# Altium PCB PCB_AIO.PcbDoc (part 2 of 2)
Units mm, origin at the board's own origin, x right, y up, seen from the top; angles counter-clockwise.
Board outline 99.69 x 91.46 mm, 2 copper layers (Top Layer, Bottom Layer), stack 0.325 mm thick; 117 components, 99 nets, 490 pads, 154 vias.
Unrouted connection lines stored in the file: 95.
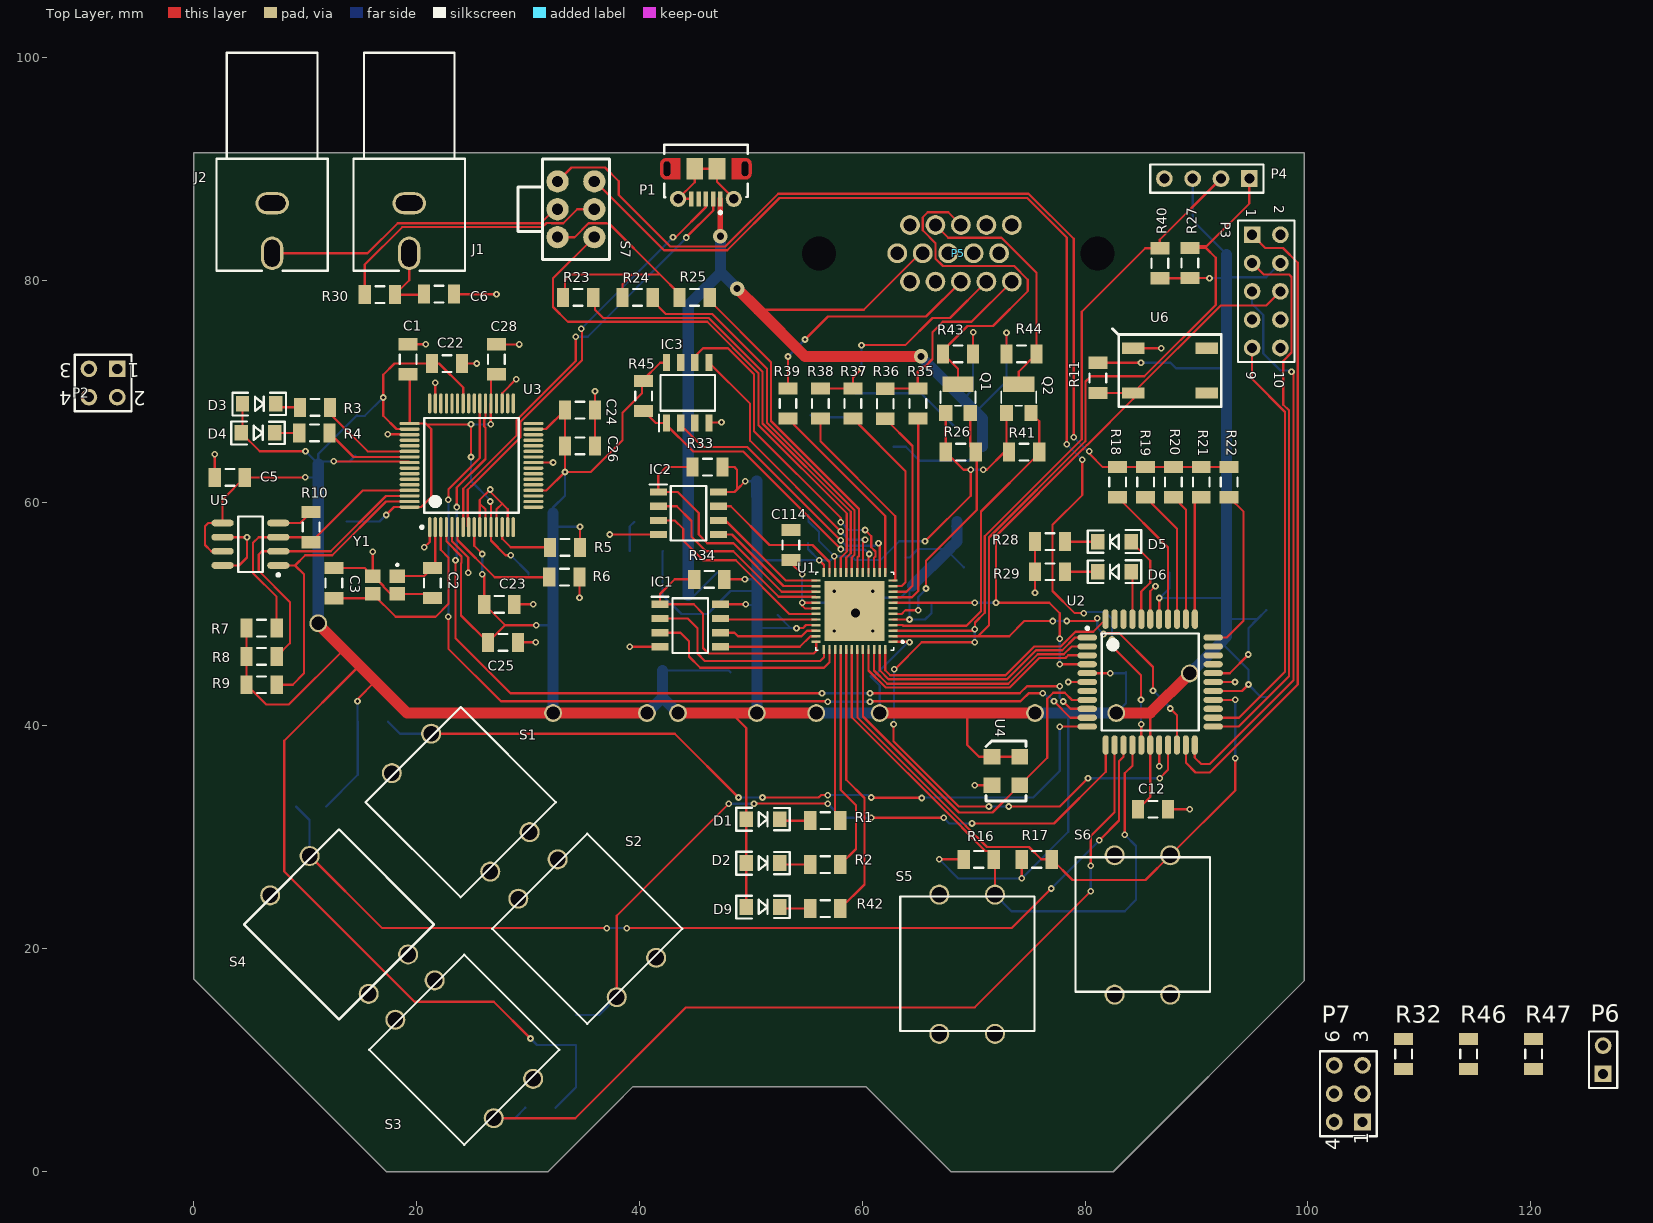
[diagram p0: Top Layer view]

## Via types
v1: diameter 0.6, hole 0.3, Top Layer to Bottom Layer, 151 vias
v2: diameter 1.3, hole 0.65, Top Layer to Bottom Layer, 3 vias

## Nets (pads, with @x,y where several pads share a name; then routed paths per layer and width w, separated by ;. In a path a pad name is that pad's centre, name@x,y a point inside that pad or via, vN(x,y) a via of type N, cw(c..) or ccw(c..) an arc to the next point about the centre after c; other vN are vias at no path point) (continued)
VDD_3.3V: (continued)
  Bottom Layer w0.2: v1(10.025,62.3) 11.106,62.3 11.176,62.23 ; v1(10.033,64.643) 11.176,63.5 ; 11.176,63.491 11.176,63.5 ; 11.418,63.733 v1(12.581,63.733) 13.996,63.733 C21.2 ; R15.1 14.731,35.606 R12.1 14.7,40.417 v1(14.7,42.198) ; C20.2@14.668,67.881 11.176,64.389 11.176,63.5 ; C20.2 15.367,67.818 v1(17.018,69.469) ; v1(25.908,53.594) v1(25.908,55.422) ; v1(30.226,11.938) 30.814,11.35 R13.1 34.309,7.559 R14.1 ; v1(30.734,49.022) 32.258,49.022 ; 32.258,57.912 32.305,57.865 v1(34.671,57.865) ; 32.258,59.09 32.258,59.596 33.321,60.659 v1(33.321,62.785) ; U7.4 48.013,44.976 C8.1 ; D7.1 42.088,55.655 U7.2 43.776,50.038 46.125,50.038 C9.2 50.515,52.101 50.546,52.07 ; v1(49.474,53.149) 50.546,53.149 ; v1(49.515,61.961) 50.531,61.961 50.703,62.133 ; v1(49.538,50.903) 49.599,50.842 50.546,50.838 ; 50.389,44.801 50.546,44.958 ; 50.546,48.764 v1(54.102,48.77) 53.597,48.77 C116.2 ; 50.546,54.864 v1(56.134,54.864) ; C115.2 55.134,55.864 v1(56.134,54.864) ; C117.2 55.19,58.348 56.134,57.404 56.134,56.579 v1(57.5,55.214) ; pad.2@61.568,41.148 61.568,43.627 C4.2 61.055,44.45 64.103,47.498 v1(64.25,47.498) ; v1(65.639,56.562) 63.314,56.562 61.624,54.872 59.407,54.872 59.065,55.214 v1(57.5,55.214) ; v1(66.92,28.02) 68.633,26.308 v1(74.314,26.308) 78.489,30.483 78.489,41.148 ; v1(69.737,62.992) v1(70.866,62.992) ; pad.2@76.2,41.402 76.454,41.148 ; v1(82.271,44.729) 83.606,44.729 C11.2 83.678,42.022 pad.2@82.804,41.148 ; v1(85.028,72.582) 87.676,72.582 88.164,72.094 92.16,72.094 92.71,72.644 ; v1(86.652,51.469) v1@86.695,51.469 ; C10.2 87.55,52.324 v1@86.695,51.469 ; pad.2@89.408,44.704 pad.2@89.916,45.212 ; P4.3 89.662,85.344 92.71,82.296 ; v1(91.172,80.184) 92.63,80.184 92.71,80.264 96.266,80.264 P3.4 ; 92.202,47.498 94.667,45.033 v1(94.667,43.706) 95.781,42.592 C13.2 ; 92.71,49.53 92.759,49.579 95.473,49.579 ; 92.71,51.562 92.617,51.469 v1@86.695,51.469 ; v1(94.662,46.402) 94.662,48.768 95.473,49.579 ; C14.2 95.473,49.579 ; v1(56.134,54.864) 57.15,54.864 v1(57.5,55.214)
  Bottom Layer w1: pad.2@11.176,49.201 11.176,62.23 11.176,63.491 ; pad.2@32.258,41.148 32.258,49.022 32.258,57.912 32.258,59.09 ; pad.2@40.686,41.148 42.088,42.55 ; U7.4 42.088,42.55 ; pad.2@43.49,41.148 42.088,42.55 ; 50.531,61.961 50.531,60.633 50.546,60.618 50.546,54.864 50.546,53.149 50.546,52.07 50.546,50.838 50.546,44.958 pad.2@50.546,41.148 ; pad.2@55.88,41.148 pad.2@61.568,41.148 ; pad.2@75.512,41.148 76.454,41.148 pad.2@82.804,41.148 ; pad.2@89.916,45.212 92.202,47.498 92.71,48.006 92.71,49.53 92.71,51.562 92.71,57.404 92.71,72.644 92.71,80.264 92.71,82.296
VGA_B: P5.3 R39.1 | length 21.2
  Top Layer w0.2: R39.1 v1(53.341,73.152) ; v1(54.864,74.676) 56.928,76.74 65.729,76.74 P5.3
  Bottom Layer w0.2: v1(53.341,73.152) v1(54.864,74.676)
VGA_B0: R39.2 U1.13 | length 17.5
  Top Layer w0.2: R39.2 53.341,67.563 62.068,58.836 U1.13
VGA_G: P5.2 R37.1 R38.1 | length 20.7
  Top Layer w0.2: R38.1 R37.1 59.166,71.262 v1(59.944,72.04) ; v1(59.944,74.168) 63.877,74.168 66.315,76.607 67.882,76.607 P5.2
  Bottom Layer w0.2: v1(59.944,72.04) v1(59.944,74.168)
VGA_G0: R37.2 U1.11 | length 17.9
  Top Layer w0.2: R37.2 63.877,62.872 63.877,52.868 63.551,52.542 U1.11
VGA_G1: R38.2 U1.12 | length 17.8
  Top Layer w0.2: R38.2 56.254,65.532 62.968,58.818 62.968,53.052 62.958,53.042 U1.12 ; R38.2@56.378,67.447 R38.2@56.59,67.235
VGA_HSYNC: P5.13 Q1.3 R43.2 | length 31.7
  Top Layer w0.2: Q1.3 68.604,72.04 R43.2 67.254,73.69 69.448,75.883 71.731,75.883 74.863,79.016 74.863,80.047 73.64,81.27 67.244,81.27 66.568,81.945 66.568,83.342 65.433,84.477 65.433,85.635 65.887,86.088 67.719,86.088 P5.13
VGA_R: P5.1 R35.1 R36.1 | length 17.6
  Top Layer w0.2: R36.1 62.089,70.283 R35.1 64.991,71.792 65.451,72.252 65.651,72.252 66.315,72.917 66.315,75.333 67.238,76.257 69.818,76.257 P5.1
VGA_R0: R35.2 U1.9 | length 18
  Top Layer w0.2: U1.9 64.466,51.542 65.024,52.1 65.024,67.55 R35.2
VGA_R1: R36.2 U1.10 | length 18
  Top Layer w0.2: R36.2 64.516,65.114 64.516,52.578 63.98,52.042 U1.10
VGA_VSYNC: P5.14 Q2.3 R44.2 | length 21.5
  Top Layer w0.2: P5.14 67.711,83.81 72.497,83.81 75.649,80.658 R44.2 74.051,71.792 Q2.3
VIDEO: J2.2B S7.2 | length 27.3
  Top Layer w0.2: J2.2B 15.607,82.409 18.308,85.11 31.151,85.11 32.401,86.36 S7.2
VIDEO_FPGA: R23.2 R24.2 R25.2 S7.1 | length 27.2
  Top Layer w0.2: S7.1 34.191,83.86 35.441,85.11 37.064,85.11 37.084,85.09 37.267,85.09 41.839,80.518 ; R23.2 33.321,78.617 33.321,79.984 33.855,80.518 39.37,80.518 ; R24.2 38.493,79.641 39.37,80.518 ; R25.2 43.608,78.749 41.839,80.518 ; 39.37,80.518 41.839,80.518
VIDEO_FPGA_1: R23.1 U1.20 | length 40
  Top Layer w0.2: R23.1 36.021,78.281 36.021,77.343 36.752,76.612 46.234,76.612 51.054,71.792 51.054,67.127 58.968,59.213 58.968,55.491 58.568,55.091 U1.20
VIDEO_FPGA_2: R24.1 U1.19 | length 34.8
  Top Layer w0.2: R24.1 41.193,78.149 42.38,76.962 46.544,76.962 51.466,72.04 51.466,67.21 59.318,59.358 59.318,55.346 59.068,55.096 U1.19
VIDEO_FPGA_3: R25.1 U1.18 | length 30.3
  Top Layer w0.2: R25.1 46.308,78.149 51.816,72.641 51.816,67.355 59.71,59.461 59.71,55.243 59.568,55.101 U1.18
VIDEO_UC: R18.2 R19.2 R20.2 R21.2 R22.2 S7.3 | length 87.3
  Top Layer w0.2: S7.3 33.909,90.11 36.908,90.11 38.145,88.873 38.145,87.641 42.755,83.031 47.738,83.031 52.464,87.757 74.93,87.757 78.981,83.706 78.981,66.018 78.876,65.913 v1(78.994,65.913) ; v1(80.391,64.643) 80.391,64.417 81.588,63.22 R18.2 R19.2 R20.2 R21.2 R22.2
  Bottom Layer w0.2: v1(78.994,65.913) 80.264,64.643 v1(80.391,64.643)
VIDEO_UC_1: R18.1 U2.37 | length 12.8
  Top Layer w0.2: R18.1 87.452,55.998 U2.37
VIDEO_UC_2: R19.1 U2.36 | length 12.1
  Top Layer w0.2: R19.1 88.252,57.698 U2.36
VIDEO_UC_3: R20.1 U2.35 | length 11.4
  Top Layer w0.2: R20.1 89.052,59.398 U2.35
VIDEO_UC_4: R21.1 U2.34 | length 11.2
  Top Layer w0.2: U2.34 89.852,59.942 R21.1
VIDEO_UC_5: R22.1 U2.33 | length 15
  Top Layer w0.2: U2.33 92.71,47.929 94.234,49.453 94.234,59.216 R22.1
pads on no net: P1.4 P3.7 P3.8 P5. P5.4 P5.11 P5.12 P5.15 S1.0 S1.3 S2.0 S2.3 S3.0 S3.3 S4.0 S4.3 S5.0 S5.3 S6.0 S6.3 U2.7 U2.25 U2.30 U2.31 U2.32 U2.42 U2.43 U3.19 U3.22 U3.26 U3.27 U3.28 U3.29 U3.30 U3.32 U3.33 U3.34 U3.36 U3.40 U3.41 U3.43 U3.44 U3.45 U3.46 U3.48 U3.52 U3.53 U3.57 U3.58 U3.59 U3.60 U6.2 U6.4
copper on no net: | length 81.4
  Top Layer w0.2: 40.386,68.246 41.462,67.17 42.442,67.17 42.442,66.999 44.809,64.633 49.299,64.633 v1(58.068,55.864) ; 43.712,67.17 43.712,66.999 45.687,65.024 49.686,65.024 v1(58.068,56.642) ; 46.252,72.594 49.942,68.905 49.942,65.575 v1(58.068,57.449) ; 60.068,53.742 60.068,56.404 60.26,56.596 v1(60.26,56.704) ; 60.568,53.742 60.578,53.752 60.578,55.363 v1(60.637,55.422) ; v1(61.468,56.388) 61.468,56.28 61.568,56.18 61.568,53.742
  Bottom Layer w0.2: 55.372,67.865 55.532,67.705 58.547,67.705 ; v1(58.068,55.864) 58.128,55.804 60.255,55.804 v1(60.637,55.422) ; v1(58.068,56.642) 58.556,56.154 61.126,56.154 61.36,56.388 v1(61.468,56.388) ; v1(58.068,57.449) 58.813,56.704 v1(60.26,56.704)

## Polygon pours and split planes (outlines as drawn)
DGND on Bottom Layer "DGND" (solid, remove dead copper, shelved, pour order 4): 155.702,43.434

## Silkscreen, mask and mechanical layers (free items; w line width, h text height)
Bottom Overlay:
  region: 1565 vertices and 1 holes, not listed, extent 3.785,9.373 46.457,86.589
Mechanical 9:
  the board outline again, w0.2

## Text inside footprints (layer, text, board x,y; h text height)
J1: Mechanical 1 "PCB Edge" at 23.962,90.572 h0.25 r180
J2: Mechanical 1 "PCB Edge" at 11.662,90.572 h0.25 r180
P2: Top Overlay "1" at -4.826,72.548 h1.27 r180; Top Overlay "2" at -4.318,70.008 h1.27 r180; Top Overlay "4" at -10.922,70.008 h1.27 r180; Top Overlay "3" at -10.922,72.548 h1.27 r180
P3: Top Overlay "1" at 94.481,86.424 h0.9 r270; Top Overlay "2" at 96.981,86.724 h0.9 r270; Top Overlay "9" at 94.481,71.824 h0.9 r270; Top Overlay "10" at 96.981,71.824 h0.9 r270
P7: Top Overlay "4" at 102.87,1.905 h1.27 r90; Top Overlay "1" at 105.41,2.413 h1.27 r90; Top Overlay "3" at 105.41,11.557 h1.27 r90; Top Overlay "6" at 102.87,11.557 h1.27 r90